# Altium PCB Linux_board.va_2.PcbDoc (part 1 of 2)
Units mil, origin at the board's own origin, x right, y up, seen from the top; angles counter-clockwise.
Board outline 3960 x 3160 mil, 2 copper layers (Top Layer, Bottom Layer); 142 components, 153 nets, 700 pads, 148 vias.
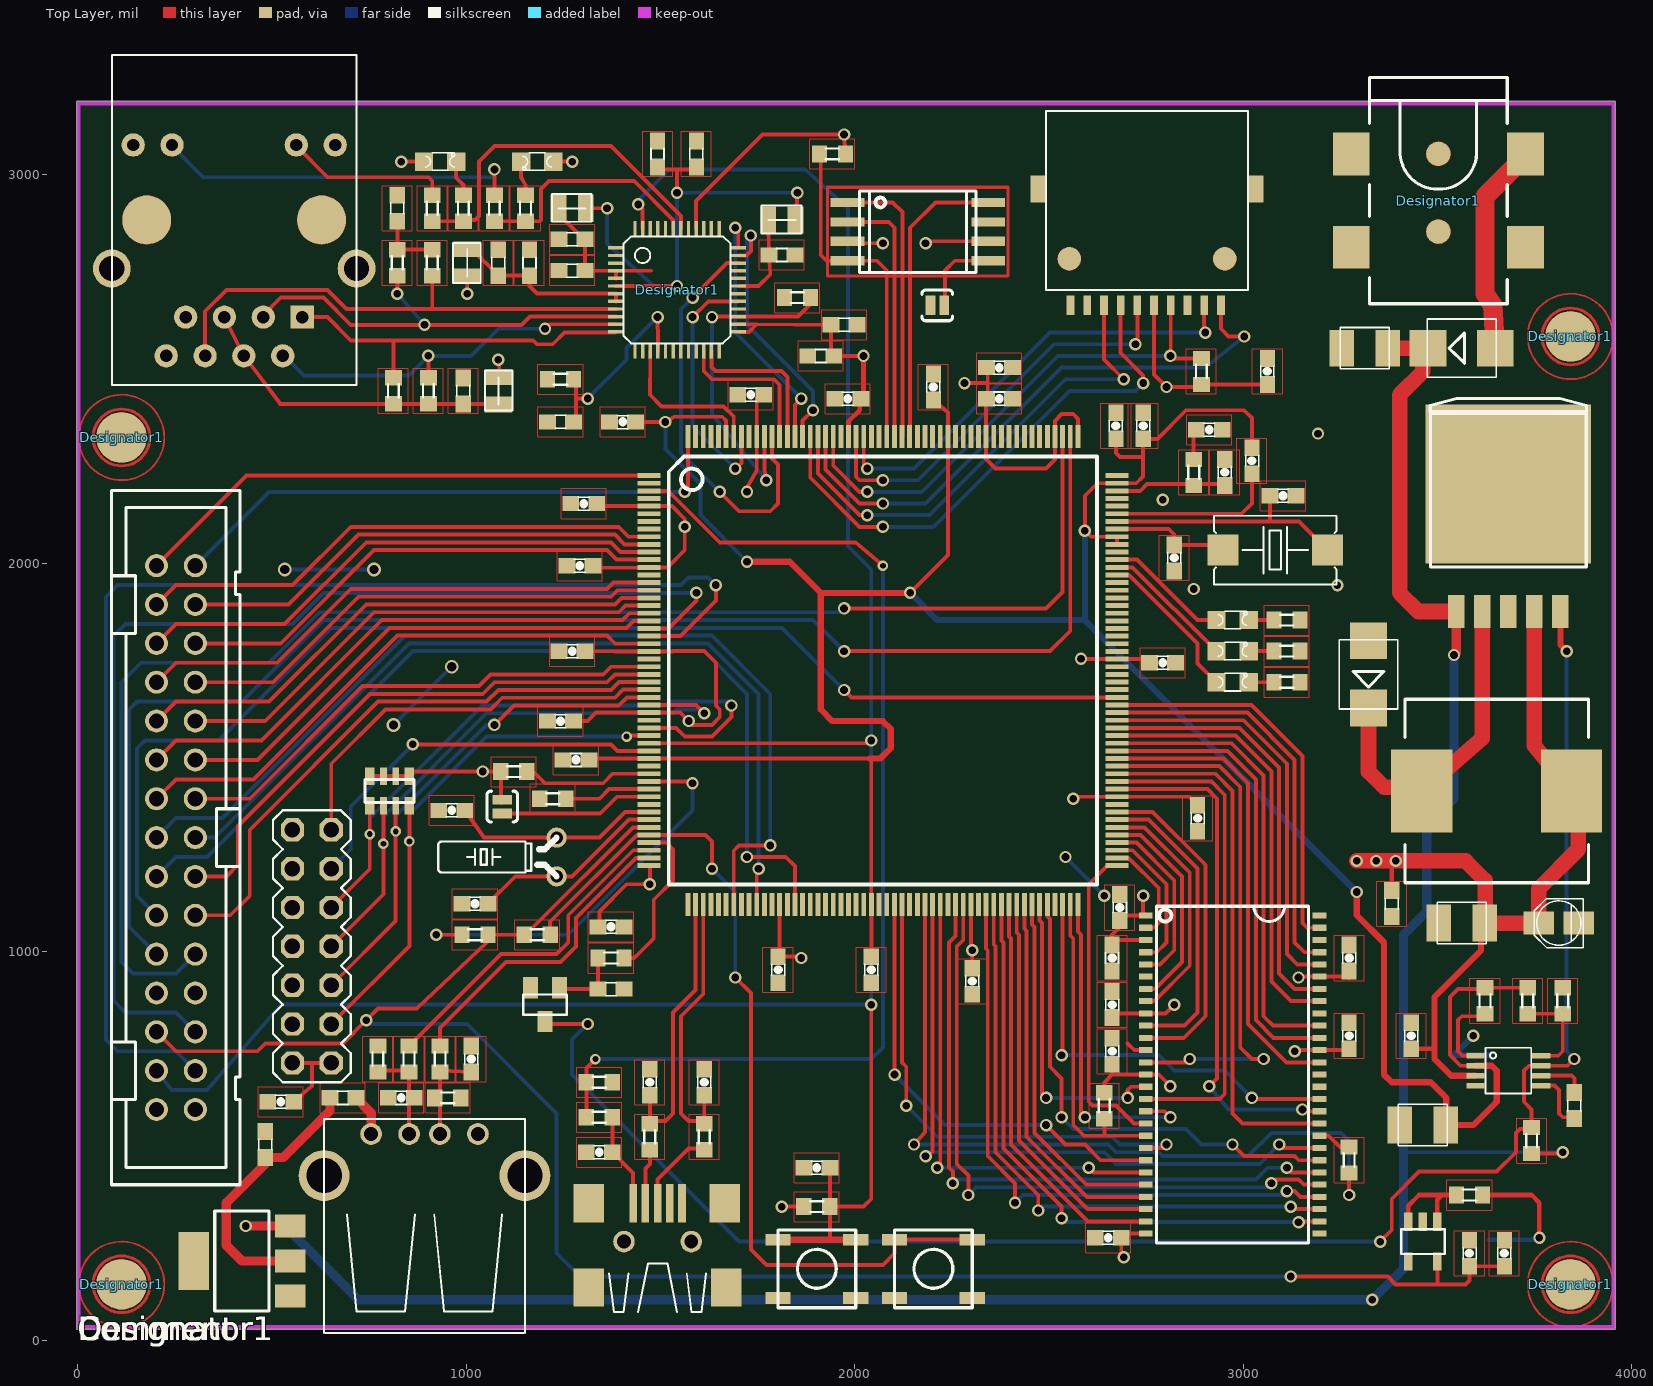
[diagram p0: Top Layer view]
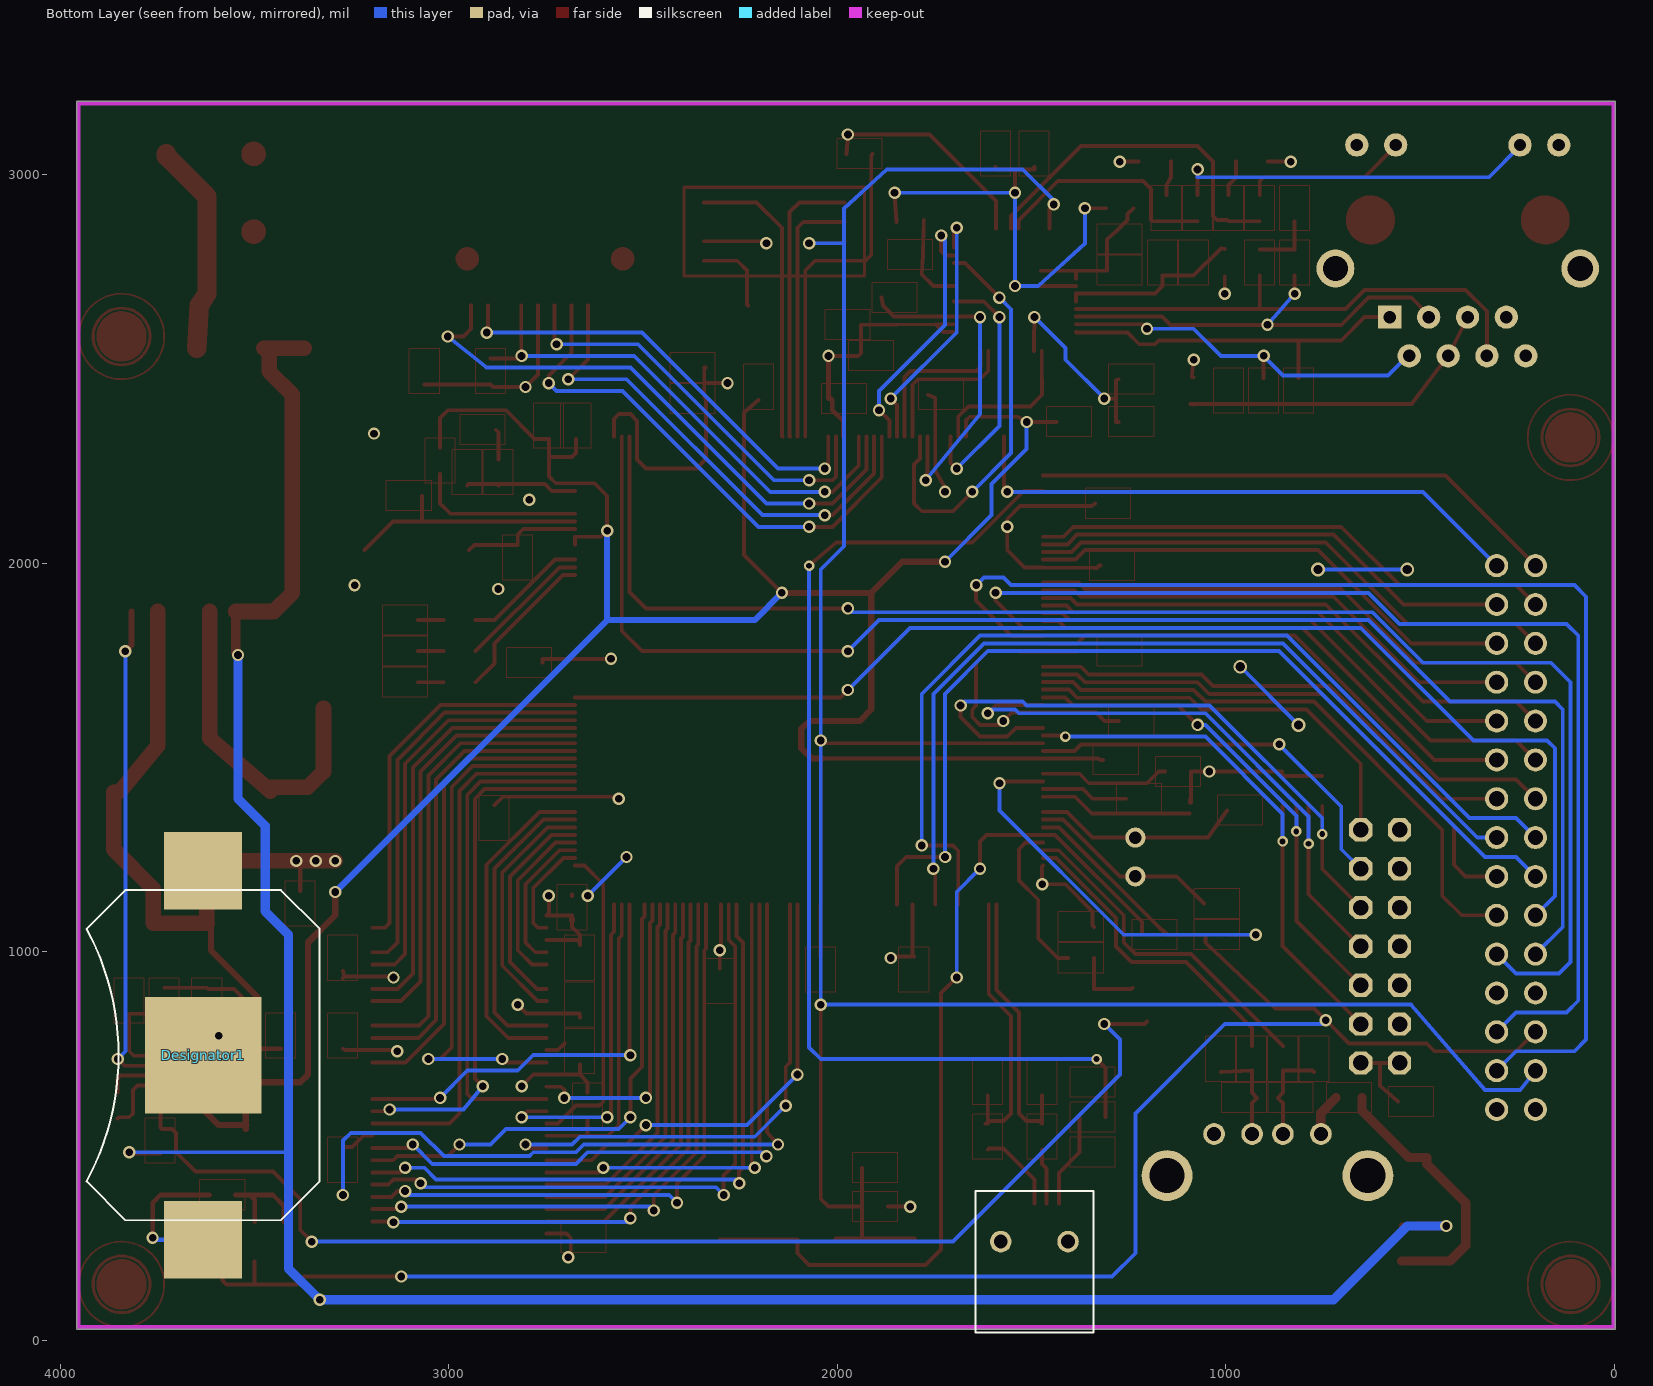
[diagram p1: Bottom Layer view, seen from below]

## Layer stack, top to bottom
Top Layer: signal copper 1.4
Dielectric: dielectric 12.6, FR-4, Dk 4.8
Bottom Layer: signal copper 1.4

## Board outline
-1.98,29.27 3958.02,29.27 3958.02,3189.27 -1.98,3189.27

## Design rules (kind name [scope] priority, off if disabled: settings)
Clearance [All] p1: gap=10
PolygonConnect [All] p1: connectstyle=Relief reliefconductorwidth=10 reliefentries=4 polygonreliefangle="90 Angle"
RoutingVias [All] p1: holewidth=28 width=50 viastyle="Through Hole" minholewidth=28 minwidth=50 maxholewidth=28 maxwidth=50
SilkscreenOverComponentPads [All] p1: minsilkscreentomaskgap=10
SolderMaskExpansion [All] p1: expansion=4
Width [All] p1: maxlimit=10 minlimit=10 preferedwidth=10
27 further rules are at their usual default settings.

## Components (designator, comment, footprint, x,y, rotation, side; value= is the part's Value field where it differs from the comment)
Designator1 "Comment" PAK100/2500-30 253.02,1294.27 r90 top (schematic designator X4)
Designator1 "Comment" 5X8 3083.02,2034.27 r0 top (schematic designator X3)
Designator1 "Comment" USB-A-H 893.02,424.27 r90 top (schematic designator X2)
Designator1 "Comment" USB-MB-S 1493.02,254.27 r90 top (schematic designator X1)
Designator1 "Comment" TACT_SWITCH_SMALL 2203.02,184.27 r180 top (schematic designator WAKE)
Designator1 "Comment" SOT223 423.02,204.27 r90 top (schematic designator VREG1)
Designator1 "Comment" SOT-23-5 3463.02,254.27 r180 top (schematic designator VR1)
Designator1 "Comment" MICROSD 2943.02,2664.27 r270 top (schematic designator USD)
Designator1 "Comment" PQFP208 2073.02,1724.27 r0 top (schematic designator U3)
Designator1 "Comment" SO08W 2163.02,2854.27 r270 top (schematic designator U1)
Designator1 "Comment" CDRH125 3653.02,1414.27 r90 top (schematic designator U$3)
Designator1 "Comment" POWER_JACK_SMD 3503.02,3054.27 r270 top (schematic designator U$2)
Designator1 "Comment" 48PIN-TQFN 1543.02,2704.27 r0 top (schematic designator U$1)
Designator1 "Comment" TACT_SWITCH_SMALL 1903.02,184.27 r0 top (schematic designator SW1)
Designator1 "Comment" MA07-2 603.02,1014.27 r90 top (schematic designator SV1)
Designator1 "Comment" CHIPLED_0805 933.02,3034.27 r270 top (schematic designator SPEED)
Designator1 "Comment" SJ_2S-NO 2213.02,2664.27 r180 top (schematic designator SJ6)
Designator1 "Comment" SJ_2S-NO 1093.02,1374.27 r270 top (schematic designator SJ3)
Designator1 "Comment" RN8P-4R-CRA06S 803.02,1414.27 r0 top (schematic designator RN2)
Designator1 "Comment" R0603 993.02,2914.27 r90 top (schematic designator R36)
Designator1 "Comment" R0603 1153.02,2914.27 r90 top (schematic designator R35)
Designator1 "Comment" R0603 3623.02,874.27 r90 top (schematic designator R34)
Designator1 "Comment" R0603 3733.02,874.27 r270 top (schematic designator R33)
Designator1 "Comment" R0603 3823.02,874.27 r270 top (schematic designator R32)
Designator1 "Comment" R0603 3273.02,464.27 r270 top (schematic designator R31)
Designator1 "Comment" R0603 1373.02,984.27 r180 top (schematic designator R30)
Designator1 "Comment" R0603 3743.02,514.27 r270 top (schematic designator R29)
Designator1 "Comment" R0603 813.02,2444.27 r270 top (schematic designator R28)
Designator1 "Comment" R0603 1903.02,344.27 r0 top (schematic designator R27)
Designator1 "Comment" R0603 903.02,2444.27 r270 top (schematic designator R26)
Designator1 "Comment" R0603 1123.02,1464.27 r0 top (schematic designator R25)
Designator1 "Comment" R0603 823.02,2774.27 r90 top (schematic designator R24)
Designator1 "Comment" R0603 3583.02,374.27 r180 top (schematic designator R23)
Designator1 "Comment" R0603 3113.02,1694.27 r0 top (schematic designator R22)
Designator1 "Comment" R0603 1183.02,1044.27 r180 top (schematic designator R21)
Designator1 "Comment" R0603 2873.02,2234.27 r90 top (schematic designator R20)
Designator1 "Comment" R0603 1023.02,1044.27 r0 top (schematic designator R19)
Designator1 "Comment" R0603 3113.02,1774.27 r0 top (schematic designator R17)
Designator1 "Comment" R0603 3113.02,1854.27 r0 top (schematic designator R16)
Designator1 "Comment" R0603 1243.02,2474.27 r180 top (schematic designator R15)
Designator1 "Comment" R0603 1223.02,1394.27 r0 top (schematic designator R14)
Designator1 "Comment" R0603 2893.02,2494.27 r270 top (schematic designator R13)
Designator1 "Comment" R0603 1343.02,664.27 r0 top (schematic designator R12)
Designator1 "Comment" R0603 1343.02,574.27 r180 top (schematic designator R11)
Designator1 "Comment" R0603 913.02,2774.27 r90 top (schematic designator R10)
Designator1 "Comment" R0603 1853.02,2684.27 r0 top (schematic designator R9)
Designator1 "Comment" R0603 953.02,624.27 r180 top (schematic designator R8)
Designator1 "Comment" R0603 773.02,724.27 r270 top (schematic designator R7)
Designator1 "Comment" R0603 2643.02,604.27 r270 top (schematic designator R6)
Designator1 "Comment" R0603 1073.02,2914.27 r90 top (schematic designator R5A)
Designator1 "Comment" R0603 1943.02,3054.27 r0 top (schematic designator R5)
Designator1 "Comment" R0603 913.02,2914.27 r90 top (schematic designator R4A)
Designator1 "Comment" R0603 933.02,724.27 r90 top (schematic designator R4)
Designator1 "Comment" R0603 853.02,724.27 r90 top (schematic designator R3)
Designator1 "Comment" R0603 1473.02,524.27 r90 top (schematic designator R2)
Designator1 "Comment" R0603 1613.02,524.27 r90 top (schematic designator R1)
Designator1 "Comment" SOT23 1203.02,864.27 r180 top (schematic designator Q2)
Designator1 "Comment" TC26H 1233.02,1244.27 r90 top (schematic designator Q1)
Designator1 "Comment" CHIPLED_0805 1183.02,3034.27 r90 top (schematic designator LINK/ACT)
Designator1 "Comment" CHIPLED_0805 2973.02,1694.27 r270 top (schematic designator LED3)
Designator1 "Comment" CHIPLED_0805 2973.02,1774.27 r270 top (schematic designator LED2)
Designator1 "Comment" CHIPLED_0805 2973.02,1854.27 r270 top (schematic designator LED1)
Designator1 "Comment" WE-KI_0805_B 1813.02,2884.27 r0 top (schematic designator L4)
Designator1 "Comment" WE-KI_0805_B 1273.02,2914.27 r0 top (schematic designator L3)
Designator1 "Comment" WE-KI_0805_B 1003.02,2774.27 r90 top (schematic designator L2)
Designator1 "Comment" WE-KI_0805_B 1083.02,2444.27 r270 top (schematic designator L1)
Designator1 "Comment" STAND-OFF 113.02,144.27 r0 top (schematic designator JP4)
Designator1 "Comment" STAND-OFF 3843.02,144.27 r0 top (schematic designator JP3)
Designator1 "Comment" STAND-OFF 113.02,2324.27 r0 top (schematic designator JP2)
Designator1 "Comment" STAND-OFF 3843.02,2584.27 r0 top (schematic designator JP1)
Designator1 "Comment" HR911105A 403.02,2884.27 r0 top (schematic designator J4)
Designator1 "Comment" MSOP8 3683.02,694.27 r0 top (schematic designator IC4)
Designator1 "Comment" TSOP54-400 2973.02,684.27 r270 top (schematic designator IC2)
Designator1 "Comment" TO263-5 3683.02,2104.27 r0 top (schematic designator IC1)
Designator1 "Comment" 0603 683.02,624.27 r180 top (schematic designator F1)
Designator1 "Comment" SMB 3323.02,1714.27 r90 top (schematic designator D2)
Designator1 "Comment" SMB 3563.02,2554.27 r0 top (schematic designator D1)
Designator1 "Comment" C0603 823.02,2914.27 r90 top (schematic designator C75)
Designator1 "Comment" C0603 3383.02,1124.27 r270 top (schematic designator C74)
Designator1 "Comment" 0603-CAP 523.02,614.27 r180 top (schematic designator C63)
Designator1 "Comment" 0603-CAP 2373.02,2504.27 r180 top (schematic designator C62)
Designator1 "Comment" C0603 1243.02,2364.27 r0 top (schematic designator C61)
Designator1 "Comment" C0603 993.02,2444.27 r90 top (schematic designator C60)
Designator1 "Comment" C0603 1913.02,2534.27 r180 top (schematic designator C59)
Designator1 "Comment" C0603 1973.02,2614.27 r0 top (schematic designator C58)
Designator1 "Comment" C0603 1813.02,2794.27 r180 top (schematic designator C57)
Designator1 "Comment" C0603 1273.02,2754.27 r180 top (schematic designator C56)
Designator1 "Comment" C0603 1273.02,2834.27 r180 top (schematic designator C55)
Designator1 "Comment" 0603-CAP 1803.02,954.27 r270 top (schematic designator C53)
Designator1 "Comment" C0603 1593.02,3054.27 r90 top (schematic designator C52)
Designator1 "Comment" 0603-CAP 3273.02,984.27 r270 top (schematic designator C51)
Designator1 "Comment" 0603-CAP 3273.02,784.27 r270 top (schematic designator C50)
Designator1 "Comment" 0603-CAP 2663.02,864.27 r270 top (schematic designator C49)
Designator1 "Comment" 0603-CAP 2663.02,984.27 r90 top (schematic designator C48)
Designator1 "Comment" 0603-CAP 2653.02,264.27 r0 top (schematic designator C47)
Designator1 "Comment" 0603-CAP 2663.02,744.27 r270 top (schematic designator C46)
Designator1 "Comment" 0603-CAP 2683.02,1114.27 r270 top (schematic designator C45)
Designator1 "Comment" 0603-CAP 2303.02,924.27 r270 top (schematic designator C44)
Designator1 "Comment" C603 3853.02,604.27 r90 top (schematic designator C43)
Designator1 "Comment" SMC_B 3463.02,554.27 r180 top (schematic designator C42)
Designator1 "Comment" C603 483.02,504.27 r270 top (schematic designator C41)
Designator1 "Comment" 0603-CAP 2883.02,1344.27 r270 top (schematic designator C40)
Designator1 "Comment" SMC_B 3563.02,1074.27 r180 top (schematic designator C39)
Designator1 "Comment" CASE_A 3813.02,1074.27 r180 top (schematic designator C38)
Designator1 "Comment" 0603-CAP 2793.02,1744.27 r0 top (schematic designator C37)
Designator1 "Comment" C0603 1493.02,3054.27 r90 top (schematic designator C36)
Designator1 "Comment" 0603-CAP 3583.02,224.27 r270 top (schematic designator C35)
Designator1 "Comment" 0603-CAP 1903.02,444.27 r180 top (schematic designator C34)
Designator1 "Comment" SMC_B 3313.02,2554.27 r180 top (schematic designator C33)
Designator1 "Comment" C603 1373.02,904.27 r180 top (schematic designator C32)
Designator1 "Comment" 0603-CAP 2913.02,2344.27 r180 top (schematic designator C31)
Designator1 "Comment" 0603-CAP 2953.02,2234.27 r270 top (schematic designator C30)
Designator1 "Comment" 0603-CAP 3023.02,2264.27 r270 top (schematic designator C29)
Designator1 "Comment" 0603-CAP 2743.02,2354.27 r90 top (schematic designator C28)
Designator1 "Comment" 0603-CAP 3673.02,224.27 r90 top (schematic designator C27)
Designator1 "Comment" C0603 1163.02,2774.27 r270 top (schematic designator C26)
Designator1 "Comment" 0603-CAP 3433.02,784.27 r90 top (schematic designator C25)
Designator1 "Comment" 0603-CAP 3063.02,2494.27 r90 top (schematic designator C24)
Designator1 "Comment" 0603-CAP 1733.02,2434.27 r180 top (schematic designator C23)
Designator1 "Comment" 0603-CAP 1983.02,2424.27 r180 top (schematic designator C22)
Designator1 "Comment" 0603-CAP 1373.02,1064.27 r0 top (schematic designator C21)
Designator1 "Comment" 0603-CAP 1243.02,1594.27 r180 top (schematic designator C20)
Designator1 "Comment" 0603-CAP 1273.02,1774.27 r180 top (schematic designator C19)
Designator1 "Comment" 0603-CAP 1293.02,1994.27 r180 top (schematic designator C18)
Designator1 "Comment" 0603-CAP 1303.02,2154.27 r180 top (schematic designator C17)
Designator1 "Comment" 0603-CAP 2203.02,2454.27 r90 top (schematic designator C16)
Designator1 "Comment" 0603-CAP 2673.02,2354.27 r90 top (schematic designator C15)
Designator1 "Comment" 0603-CAP 2043.02,954.27 r270 top (schematic designator C14)
Designator1 "Comment" 0603-CAP 1283.02,1494.27 r180 top (schematic designator C13)
Designator1 "Comment" C0603 1083.02,2774.27 r270 top (schematic designator C12)
Designator1 "Comment" 0603-CAP 1023.02,1124.27 r0 top (schematic designator C11)
Designator1 "Comment" 0603-CAP 963.02,1364.27 r0 top (schematic designator C10)
Designator1 "Comment" 0603-CAP 2823.02,2014.27 r90 top (schematic designator C9)
Designator1 "Comment" 0603-CAP 3103.02,2174.27 r180 top (schematic designator C8)
Designator1 "Comment" 0603-CAP 1403.02,2364.27 r180 top (schematic designator C7)
Designator1 "Comment" 0603-CAP 2373.02,2424.27 r0 top (schematic designator C6)
Designator1 "Comment" 0603-CAP 1013.02,724.27 r90 top (schematic designator C5)
Designator1 "Comment" 0603-CAP 833.02,624.27 r180 top (schematic designator C4)
Designator1 "Comment" 0603-CAP 1343.02,484.27 r0 top (schematic designator C3)
Designator1 "Comment" 0603-CAP 1613.02,664.27 r270 top (schematic designator C2)
Designator1 "Comment" 0603-CAP 1473.02,664.27 r270 top (schematic designator C1)
Designator1 "Comment" 2032 3633.02,734.27 r270 bottom (schematic designator BATT1)

## Footprints (in the part's own frame and the unit in brackets; to place one, negate y for a bottom-side part, rotate by r counter-clockwise, add the part's x,y. Pads: shape width x height; smd on the part's side, far side on the other; paste and mask are expansions set on the pad)
5X8 [mil]
  rect 80x80 smd: 1(-135,0) 2(135,0)
  silkscreen extent -157,-89 157,89
48PIN-TQFN [mm]
  rect 1x0.22 smd: P$1(-4,2.75) P$2(-4,2.25) P$3(-4,1.75) P$4(-4,1.25) P$5(-4,0.75) P$6(-4,0.25) P$7(-4,-0.25) P$8(-4,-0.75) P$9(-4,-1.25) P$10(-4,-1.75) P$11(-4,-2.25) P$12(-4,-2.75) P$25(4,-2.75) P$26(4,-2.25) P$27(4,-1.75) P$28(4,-1.25) P$29(4,-0.75) P$30(4,-0.25) P$31(4,0.25) P$32(4,0.75) P$33(4,1.25) P$34(4,1.75) P$35(4,2.25) P$36(4,2.75)
  rect 0.22x1 smd: P$13(-2.75,-4) P$14(-2.25,-4) P$15(-1.75,-4) P$16(-1.25,-4) P$17(-0.75,-4) P$18(-0.25,-4) P$19(0.25,-4) P$20(0.75,-4) P$21(1.25,-4) P$22(1.75,-4) P$23(2.25,-4) P$24(2.75,-4) P$37(2.75,4) P$38(2.25,4) P$39(1.75,4) P$40(1.25,4) P$41(0.75,4) P$42(0.25,4) P$43(-0.25,4) P$44(-0.75,4) P$45(-1.25,4) P$46(-1.75,4) P$47(-2.25,4) P$48(-2.75,4)
  silkscreen extent -3.5,-3.5 3.5,3.5
0603 [mm]
  rect 1.1x1 smd: 1(-0.85,0) 2(0.85,0)
  Top Layer lines w0.051: 1.473,0.983 1.473,-0.983 -1.473,-0.983 -1.473,0.983 1.473,0.983
  silkscreen extent -0.36,-0.42 0.36,0.43
0603-CAP [mm]
  rect 1.1x1 smd: 1(-0.85,0) 2(0.85,0)
  Top Layer lines w0.051: 1.473,0.983 1.473,-0.983 -1.473,-0.983 -1.473,0.983 1.473,0.983
  silkscreen extent -0.36,-0.42 0.36,0.43
2032 [mil]
  rect 200x200 smd: V1(-475,0) V2(475,0)
  rect 300x300 smd: V-(0,0)
  silkscreen extent -425,-300 425,300
C0603 [mm]
  rect 1.1x1 smd: 1(-0.85,0) 2(0.85,0)
  Top Layer lines w0.051: -1.473,0.983 -1.473,-0.983 1.473,-0.983 1.473,0.983 -1.473,0.983
  silkscreen extent -0.36,-0.42 0.36,0.43
C603 [mm]
  rect 1.1x1 smd: 1(-0.85,0) 2(0.85,0)
  silkscreen extent -0.36,-0.42 0.36,0.43
CASE_A [mm]
  rect 2x1.5 smd: +(1.3,0) -(-1.3,0)
  silkscreen extent -1.6,-1.6 1.6,1.6
CDRH125 [mm]
  rect 5.4x4 smd: 1(0,4.9) 2(0,-4.9)
  silkscreen extent -6,-6 6,6
CHIPLED_0805 [mm]
  rect 1.2x1.2 smd: A(0,-1.05) C(0,1.05)
  silkscreen extent -0.58,-0.93 0.58,0.95
HR911105A [mil]
  rect 60x60 hole 32: 1(175,-250)
  round 60 hole 32: 2(125,-350) 3(75,-250) 4(25,-350) 5(-25,-250) 6(-75,-350) 7(-125,-250) 8(-175,-350) 9(260,193) 10(160,193) 11(-160,193) 12(-260,193)
  round 97.5 hole 65: 13(315,-125) 14(-315,-125)
  round 126 smd: ""(-225,0) ""(225,0)
  silkscreen extent -315,-425 315,425
MA07-2 [mil]
  oct 60x60 hole 40: 1(-300,-50) 2(-300,50) 3(-200,-50) 4(-200,50) 5(-100,-50) 6(-100,50) 7(0,-50) 8(0,50) 9(100,-50) 10(100,50) 11(200,-50) 12(200,50) 13(300,-50) 14(300,50)
  silkscreen extent -350,-100 350,100
MICROSD [mil]
  rect 50x20 smd: 1(0,-301) 2(0,-258) 3(0,-215) 4(0,-172) 5(0,-129) 6(0,-86) 7(0,-43) 8(0,0) 9(0,-344) 10(0,-387)
  rect 70x40 smd: RSV1(-300,90) RSV2(-300,-470)
  round 60 smd: ""(-120,10) ""(-120,-390)
  silkscreen extent -500,-450 -40,70
MSOP8 [mm]
  rect 1.2x0.35 smd: 1(-2.145,0.975) 2(-2.145,0.325) 3(-2.145,-0.325) 4(-2.145,-0.975) 5(2.145,-0.975) 6(2.145,-0.325) 7(2.145,0.325) 8(2.145,0.975)
  silkscreen extent -1.5,-1.5 1.5,1.5
PAK100/2500-30 [mm]
  round 1.508 hole 1: 1(-17.78,-1.27) 2(-17.78,1.27) 3(-15.24,-1.27) 4(-15.24,1.27) 5(-12.7,-1.27) 6(-12.7,1.27) 7(-10.16,-1.27) 8(-10.16,1.27) 9(-7.62,-1.27) 10(-7.62,1.27) 11(-5.08,-1.27) 12(-5.08,1.27) 13(-2.54,-1.27) 14(-2.54,1.27) 15(0,-1.27) 16(0,1.27) 17(2.54,-1.27) 18(2.54,1.27) 19(5.08,-1.27) 20(5.08,1.27) 21(7.62,-1.27) 22(7.62,1.27) 23(10.16,-1.27) 24(10.16,1.27) 25(12.7,-1.27) 26(12.7,1.27) 27(15.24,-1.27) 28(15.24,1.27) 29(17.78,-1.27) 30(17.78,1.27)
  silkscreen extent -22.7,-4.2 22.7,4.2
POWER_JACK_SMD [mm]
  rect 2.8x2.4 smd: GND(0,-5.7) P$4(6.1,-5.7) VIN0(0,5.7) VIN1(6.1,5.7)
  round 1.6 smd: ""(0,0) ""(5.08,0)
  silkscreen extent -5,-4.5 9.8,4.5
PQFP208 [mm]
  rect 1.5x0.32 smd: 1(-15.3,12.75) 2(-15.3,12.25) 3(-15.3,11.75) 4(-15.3,11.25) 5(-15.3,10.75) 6(-15.3,10.25) 7(-15.3,9.75) 8(-15.3,9.25) 9(-15.3,8.75) 10(-15.3,8.25) 11(-15.3,7.75) 12(-15.3,7.25) 13(-15.3,6.75) 14(-15.3,6.25) 15(-15.3,5.75) 16(-15.3,5.25) 17(-15.3,4.75) 18(-15.3,4.25) 19(-15.3,3.75) 20(-15.3,3.25) 21(-15.3,2.75) 22(-15.3,2.25) 23(-15.3,1.75) 24(-15.3,1.25) 25(-15.3,0.75) 26(-15.3,0.25) 27(-15.3,-0.25) 28(-15.3,-0.75) 29(-15.3,-1.25) 30(-15.3,-1.75) 31(-15.3,-2.25) 32(-15.3,-2.75) 33(-15.3,-3.25) 34(-15.3,-3.75) 35(-15.3,-4.25) 36(-15.3,-4.75) 37(-15.3,-5.25) 38(-15.3,-5.75) 39(-15.3,-6.25) 40(-15.3,-6.75) 41(-15.3,-7.25) 42(-15.3,-7.75) 43(-15.3,-8.25) 44(-15.3,-8.75) 45(-15.3,-9.25) 46(-15.3,-9.75) 47(-15.3,-10.25) 48(-15.3,-10.75) 49(-15.3,-11.25) 50(-15.3,-11.75) 51(-15.3,-12.25) 52(-15.3,-12.75) 105(15.3,-12.75) 106(15.3,-12.25) 107(15.3,-11.75) 108(15.3,-11.25) 109(15.3,-10.75) 110(15.3,-10.25) 111(15.3,-9.75) 112(15.3,-9.25) 113(15.3,-8.75) 114(15.3,-8.25) 115(15.3,-7.75) 116(15.3,-7.25) 117(15.3,-6.75) 118(15.3,-6.25) 119(15.3,-5.75) 120(15.3,-5.25) 121(15.3,-4.75) 122(15.3,-4.25) 123(15.3,-3.75) 124(15.3,-3.25) 125(15.3,-2.75) 126(15.3,-2.25) 127(15.3,-1.75) 128(15.3,-1.25) 129(15.3,-0.75) 130(15.3,-0.25) 131(15.3,0.25) 132(15.3,0.75) 133(15.3,1.25) 134(15.3,1.75) 135(15.3,2.25) 136(15.3,2.75) 137(15.3,3.25) 138(15.3,3.75) 139(15.3,4.25) 140(15.3,4.75) 141(15.3,5.25) 142(15.3,5.75) 143(15.3,6.25) 144(15.3,6.75) 145(15.3,7.25) 146(15.3,7.75) 147(15.3,8.25) 148(15.3,8.75) 149(15.3,9.25) 150(15.3,9.75) 151(15.3,10.25) 152(15.3,10.75) 153(15.3,11.25) 154(15.3,11.75) 155(15.3,12.25) 156(15.3,12.75)
  rect 0.32x1.5 smd: 53(-12.75,-15.3) 54(-12.25,-15.3) 55(-11.75,-15.3) 56(-11.25,-15.3) 57(-10.75,-15.3) 58(-10.25,-15.3) 59(-9.75,-15.3) 60(-9.25,-15.3) 61(-8.75,-15.3) 62(-8.25,-15.3) 63(-7.75,-15.3) 64(-7.25,-15.3) 65(-6.75,-15.3) 66(-6.25,-15.3) 67(-5.75,-15.3) 68(-5.25,-15.3) 69(-4.75,-15.3) 70(-4.25,-15.3) 71(-3.75,-15.3) 72(-3.25,-15.3) 73(-2.75,-15.3) 74(-2.25,-15.3) 75(-1.75,-15.3) 76(-1.25,-15.3) 77(-0.75,-15.3) 78(-0.25,-15.3) 79(0.25,-15.3) 80(0.75,-15.3) 81(1.25,-15.3) 82(1.75,-15.3) 83(2.25,-15.3) 84(2.75,-15.3) 85(3.25,-15.3) 86(3.75,-15.3) 87(4.25,-15.3) 88(4.75,-15.3) 89(5.25,-15.3) 90(5.75,-15.3) 91(6.25,-15.3) 92(6.75,-15.3) 93(7.25,-15.3) 94(7.75,-15.3) 95(8.25,-15.3) 96(8.75,-15.3) 97(9.25,-15.3) 98(9.75,-15.3) 99(10.25,-15.3) 100(10.75,-15.3) 101(11.25,-15.3) 102(11.75,-15.3) 103(12.25,-15.3) 104(12.75,-15.3) 157(12.75,15.3) 158(12.25,15.3) 159(11.75,15.3) 160(11.25,15.3) 161(10.75,15.3) 162(10.25,15.3) 163(9.75,15.3) 164(9.25,15.3) 165(8.75,15.3) 166(8.25,15.3) 167(7.75,15.3) 168(7.25,15.3) 169(6.75,15.3) 170(6.25,15.3) 171(5.75,15.3) 172(5.25,15.3) 173(4.75,15.3) 174(4.25,15.3) 175(3.75,15.3) 176(3.25,15.3) 177(2.75,15.3) 178(2.25,15.3) 179(1.75,15.3) 180(1.25,15.3) 181(0.75,15.3) 182(0.25,15.3) 183(-0.25,15.3) 184(-0.75,15.3) 185(-1.25,15.3) 186(-1.75,15.3) 187(-2.25,15.3) 188(-2.75,15.3) 189(-3.25,15.3) 190(-3.75,15.3) 191(-4.25,15.3) 192(-4.75,15.3) 193(-5.25,15.3) 194(-5.75,15.3) 195(-6.25,15.3) 196(-6.75,15.3) 197(-7.25,15.3) 198(-7.75,15.3) 199(-8.25,15.3) 200(-8.75,15.3) 201(-9.25,15.3) 202(-9.75,15.3) 203(-10.25,15.3) 204(-10.75,15.3) 205(-11.25,15.3) 206(-11.75,15.3) 207(-12.25,15.3) 208(-12.75,15.3)
  silkscreen extent -14,-14 14,14
R0603 [mm]
  rect 1x1.1 smd: 1(-0.85,0) 2(0.85,0)
  Top Layer lines w0.051: -1.473,0.983 -1.473,-0.983 1.473,-0.983 1.473,0.983 -1.473,0.983
  silkscreen extent -0.43,-0.36 0.43,0.36
RN8P-4R-CRA06S [mm]
  rect 0.63x1.15 smd: 1(-1.295,-0.975) 4(1.295,-0.975) 5(1.295,0.975) 8(-1.295,0.975)
  rect 0.44x1.15 smd: 2(-0.4,-0.975) 3(0.4,-0.975) 6(0.4,0.975) 7(-0.4,0.975)
  silkscreen extent -1.6,-0.75 1.6,0.75
SJ_2S-NO [mil]
  rect 25x50 smd: 1(-17.72,0) 2(17.71,0)
  silkscreen extent -40,-39 40,39
SMB [mm]
  rect 2.4x2.4 smd: A(2.2,0) C(-2.2,0)
  silkscreen extent -2.26,-1.91 2.26,1.91
SMC_B [mm]
  rect 1.6x2.4 smd: +(-1.5,0) -(1.5,0)
  silkscreen extent -1.6,-1.35 1.6,1.35
SO08W [mm]
  rect 0.6x2.2 smd: 1(-1.905,-4.6) 2(-0.635,-4.6) 3(0.635,-4.6) 4(1.905,-4.6) 5(1.905,4.6) 6(0.635,4.6) 7(-0.635,4.6) 8(-1.905,4.6)
  Top Layer lines w0.2: 2.9,-5.9 -2.9,-5.9 -2.9,5.9 2.9,5.9 2.9,-5.9
  silkscreen extent -2.67,-3.81 2.67,3.81
SOT23 [mm]
  rect 1x1.4 smd: 1(-0.95,-1.1) 2(0.95,-1.1) 3(0,1.1)
  silkscreen extent -1.42,-0.66 1.42,0.66
SOT223 [mm]
  rect 1.5x2 smd: 1(-2.3,-3.15) 2(0,-3.15) 3(2.3,-3.15)
  rect 3.8x2 smd: 4(0,3.15)
  silkscreen extent -3.28,-1.78 3.28,1.78
SOT-23-5 [mm]
  rect 0.55x1.2 smd: 1(-0.95,-1.3) 2(0,-1.3) 3(0.95,-1.3) 4(0.95,1.3) 5(-0.95,1.3)
  silkscreen extent -1.42,-0.81 1.42,0.81
STAND-OFF [mil]
  round 130 smd: ""(0,0)
  Top Layer circle w5: c0,0 r110
  Top Layer lines w8: 0,-73 cw(c0,0) 0,73 ; 0,-73 ccw(c0,0) 0,73 ; 0,-73 cw(c0,0) 0,73 ; 0,-73 ccw(c0,0) 0,73
TACT_SWITCH_SMALL [mil]
  rect 65x30 smd: 1(-100,75) 2(100,75) 3(-100,-75) 4(100,-75)
  silkscreen extent -100,-100 100,100
TC26H [mil]
  round 52 hole 32: 1(-50,0) 2(50,0)
  silkscreen extent -50,0 50,305
TO263-5 [mil]
  rect 42x85 smd: 1(-134,-228) 2(-67,-228) 3(0,-228) 4(67,-228) 5(134,-228)
  rect 425.2x409.84 smd: 6(0,100)
  silkscreen extent -201,-113 201,320
TSOP54-400 [mm]
  rect 0.4x0.9 smd: 1(-10.4,-5.68) 2(-9.6,-5.68) 3(-8.8,-5.68) 4(-8,-5.68) 5(-7.2,-5.68) 6(-6.4,-5.68) 7(-5.6,-5.68) 8(-4.8,-5.68) 9(-4,-5.68) 10(-3.2,-5.68) 11(-2.4,-5.68) 12(-1.6,-5.68) 13(-0.8,-5.68) 14(0,-5.68) 15(0.8,-5.68) 16(1.6,-5.68) 17(2.4,-5.68) 18(3.2,-5.68) 19(4,-5.68) 20(4.8,-5.68) 21(5.6,-5.68) 22(6.4,-5.68) 23(7.2,-5.68) 24(8,-5.68) 25(8.8,-5.68) 26(9.6,-5.68) 27(10.4,-5.68) 28(10.4,5.68) 29(9.6,5.68) 30(8.8,5.68) 31(8,5.68) 32(7.2,5.68) 33(6.4,5.68) 34(5.6,5.68) 35(4.8,5.68) 36(4,5.68) 37(3.2,5.68) 38(2.4,5.68) 39(1.6,5.68) 40(0.8,5.68) 41(0,5.68) 42(-0.8,5.68) 43(-1.6,5.68) 44(-2.4,5.68) 45(-3.2,5.68) 46(-4,5.68) 47(-4.8,5.68) 48(-5.6,5.68) 49(-6.4,5.68) 50(-7.2,5.68) 51(-8,5.68) 52(-8.8,5.68) 53(-9.6,5.68) 54(-10.4,5.68)
  silkscreen extent -11.01,-4.98 11.01,4.98
USB-A-H [mil]
  round 56 hole 36: D+(107,-39.5) D-(107,39.5) GND(107,-137.5) VBUS(107,137.5)
  round 131 hole 91: P$5(0,-258.5) P$6(0,258.5)
  silkscreen extent -405,-258 146,258
USB-MB-S [mm]
  rect 2.5x0.5 smd: D+(2.5,0) D-(2.5,0.8) GND(2.5,-1.6) ID(2.5,-0.8) VBUS(2.5,1.6)
  rect 2.5x2 smd: P$1(-3,-4.5) P$2(-3,4.5) P$3(2.5,-4.4) P$4(2.5,4.5)
  round 1.408 hole 0.9: P$5(0,2.2) P$6(0,-2.2)
  silkscreen extent -4.62,-3.17 -1.44,3.17
WE-KI_0805_B [mm]
  rect 1.02x1.78 smd: 1(-0.89,0) 2(0.89,0)
  silkscreen extent -1.33,-0.88 1.27,0.93

## Via types
v1: diameter 32, hole 20, Top Layer to Bottom Layer, 84 vias
v2: diameter 31.68, hole 19.68, Top Layer to Bottom Layer, 53 vias
v3: diameter 27, hole 15, Top Layer to Bottom Layer, 7 vias
v4: diameter 35.62, hole 23.62, Top Layer to Bottom Layer, 4 vias

## Nets (pads, with @x,y where several pads share a name; then routed paths per layer and width w, separated by ;. In a path a pad name is that pad's centre, name@x,y a point inside that pad or via, vN(x,y) a via of type N, cw(c..) or ccw(c..) an arc to the next point about the centre after c; other vN are vias at no path point)
1.8V: Designator1.1@1316.49,1494.27 Designator1.1@1436.49,2364.27 Designator1.1@2043.02,987.73 Designator1.1@2203.02,2420.8 Designator1.1@2673.02,2320.8 Designator1.1@2743.02,2320.8 Designator1.1@3023.02,2297.73 Designator1.1@3733.02,907.73 Designator1.2@3598.57,707.06 Designator1.2@3623.02,907.73 Designator1.38@1470.66,1497.89 Designator1.77 Designator1.147 Designator1.148 Designator1.155 Designator1.174 Designator1.203 Designator1.+@3522.08,554.27 | length 7753.8
  Top Layer w10: Designator1.1@1316.49,1494.27 1323.02,1494.27 1329.4,1497.89 Designator1.38@1470.66,1497.89 2039.4,1497.89 2043.02,1494.27 2043.02,1122.38 Designator1.77@2043.5,1121.91 2043.5,987.73 Designator1.1@2043.02,987.73 ; Designator1.1@1436.49,2364.27 v2(1513.02,2364.27) 1536.49,2377.73 1659.56,2377.73 1669.48,2367.81 Designator1.203@1669.48,2326.63 ; v2(2143.02,1924.27) 2240.35,2021.59 Designator1.174@2240.35,2326.63 2240.35,2388.13 Designator1.1@2203.02,2420.8 ; Designator1.1@2673.02,2320.8 2673.02,2284.27 2683.02,2274.27 2743.02,2274.27 ; Designator1.147@2675.39,2049.07 Designator1.148@2675.39,2068.76 2608.54,2068.76 v2(2593.02,2084.27) 2593.02,2174.27 2625.31,2206.55 Designator1.155@2675.39,2206.55 2725.31,2206.55 2743.02,2224.27 2743.02,2274.27 ; Designator1.1@3023.02,2297.73 3023.02,2374.27 3003.02,2394.27 2853.02,2394.27 2779.56,2320.8 Designator1.1@2743.02,2320.8 2743.02,2274.27 ; Designator1.2@3598.57,707.06 3560.23,707.06 3533.02,734.27 3533.02,884.27 3553.02,904.27 3619.56,904.27 Designator1.2@3623.02,907.73 Designator1.1@3733.02,907.73
  Top Layer w16: v2(1723.02,2004.27) 1833.02,2004.27 1913.02,1924.27 ; 2039.4,1497.89 2066.65,1497.89 2093.02,1524.27 2093.02,1574.27 2073.02,1594.27 1943.02,1594.27 1913.02,1624.27 1913.02,1924.27 ; v2(2143.02,1924.27) 1913.02,1924.27 ; v2(3293.02,1154.27) 3293.02,1094.27 3363.02,1024.27 3363.02,684.27 3383.02,664.27 3483.02,664.27 3523.02,624.27 Designator1.+@3523.02,554.27 ; Designator1.+@3522.08,554.27 Designator1.+@3523.02,554.27 ; Designator1.+@3523.02,544.27 Designator1.+@3523.02,554.27 ; Designator1.2@3598.57,707.06 3640.23,707.06 3653.02,694.27 3653.02,614.27 3593.02,554.27 Designator1.+@3523.02,554.27
  Bottom Layer w10: v2(1513.02,2364.27) 1513.02,2294.27 1603.02,2204.27 1603.02,2124.27 v2(1723.02,2004.27)
  Bottom Layer w16: v2(2143.02,1924.27) 2213.02,1854.27 2593.02,1854.27 ; v2(2593.02,2084.27) 2593.02,1854.27 ; v2(3293.02,1154.27) 2593.02,1854.27
3.3V: Designator1.1@303.02,594.27 Designator1.1@556.49,614.27 Designator1.1@653.02,714.27 Designator1.1@1003.02,2739.23 Designator1.1@1083.02,2479.31 Designator1.1@1089.56,1464.27 Designator1.1@1093.02,1391.98 Designator1.1@1276.49,1594.27 Designator1.1@1306.49,1774.27 Designator1.1@1326.49,1994.27 Designator1.1@1336.49,2154.27 Designator1.1@1339.56,1064.27 Designator1.1@1766.49,2434.27 Designator1.1@1803.02,987.73 Designator1.1@1869.56,344.27 Designator1.1@1939.56,2614.27 Designator1.1@1946.49,2534.27 Designator1.1@2016.49,2424.27 Designator1.1@2303.02,957.73 Designator1.1@2339.56,2424.27 Designator1.1@2643.02,637.73 Designator1.1@2749.4,1093.72 Designator1.1@2759.56,1744.27 Designator1.1@2883.02,1377.73 Designator1.1@3063.02,2460.8 Designator1.1@3383.02,1157.73 Designator1.1@3433.02,750.8 Designator1.2@203.02,594.27 Designator1.2@553.02,714.27 Designator1.2@1976.49,3054.27 Designator1.2@2339.56,2504.27 Designator1.2@2663.02,710.8 Designator1.2@2663.02,830.8 Designator1.2@2663.02,1017.73 Designator1.2@2683.02,1080.8 Designator1.2@2686.49,264.27 Designator1.2@2893.02,2460.8 Designator1.2@3273.02,750.8 Designator1.2@3273.02,950.8 Designator1.2@3845.94,1414.27 Designator1.3@2749.4,1030.72 Designator1.3@3598.57,681.47 Designator1.4@2771.02,2664.27 Designator1.4@3750.02,1876.27 Designator1.5@854.01,1452.65 Designator1.5@1470.66,2147.5 Designator1.6@818.77,1452.65 Designator1.6@2344.13,2829.27 Designator1.7@787.28,1452.65 Designator1.8@752.04,1452.65 Designator1.9@663.02,3077.27 Designator1.9@2749.4,841.75 Designator1.12@143.02,3077.27 Designator1.13@1470.66,1990.02 Designator1.14@2749.4,684.27 Designator1.24@1470.66,1773.48 Designator1.27@2749.4,274.82 Designator1.32@1470.66,1616 Designator1.43@3196.65,747.26 Designator1.49@3196.65,936.24 Designator1.52@1470.66,1222.3 Designator1.65 Designator1.90 Designator1.114 Designator1.132 Designator1.157 Designator1.160 Designator1.169 Designator1.187 Designator1.199 Designator1.+@3622.08,1074.27 Designator1.+@3761.84,1074.27 Designator1.A@891.68,3034.27 Designator1.A@1224.36,3034.27 Designator1.P$25 Designator1.P$26 Designator1.P$40 | length 9713.5
  Top Layer w10: Designator1.2@553.02,714.27 603.02,714.27 ; Designator1.1@556.49,614.27 603.02,654.27 603.02,714.27 ; Designator1.1@653.02,714.27 603.02,714.27 ; Designator1.8@752.04,1452.65 Designator1.7@787.28,1452.65 Designator1.6@818.77,1452.65 Designator1.5@854.01,1452.65 855.62,1464.27 v2(1043.02,1464.27) Designator1.1@1089.56,1464.27 1089.56,1384.27 1093.02,1384.27 Designator1.1@1093.02,1391.98 ; v2(833.02,3034.27) Designator1.A@891.68,3034.27 ; v2(1003.02,2694.27) Designator1.1@1003.02,2739.23 ; Designator1.1@1083.02,2479.31 1088.06,2479.31 v2(1083.02,2524.27) ; Designator1.A@1224.36,3034.27 v2(1273.02,3034.27) ; Designator1.1@1276.49,1594.27 1313.02,1594.27 1334.76,1616 Designator1.32@1470.66,1616 1551.29,1616 v2(1573.02,1594.27) 1583.02,1584.27 1633.02,1584.27 1653.02,1604.27 1653.02,1624.27 1643.02,1634.27 1643.02,1744.27 1613.02,1774.27 1533.02,1774.27 1532.24,1773.48 Designator1.24@1470.66,1773.48 1382.24,1773.48 1323.02,1774.27 Designator1.1@1306.49,1774.27 ; Designator1.1@1323.02,1994.27 Designator1.1@1326.49,1994.27 1332.24,1988.52 1338.77,1988.52 Designator1.13@1470.66,1990.02 1518.77,1990.02 1563.02,2034.27 v2(1563.02,2094.27) 1563.02,2114.27 1529.8,2147.5 Designator1.5@1470.66,2147.5 1346.49,2147.5 Designator1.1@1336.49,2154.27 ; Designator1.1@1339.56,1064.27 1343.02,1067.73 1343.02,1104.27 1413.02,1174.27 v2(1473.02,1174.27) 1473.02,1219.94 Designator1.52@1470.66,1222.3 ; Designator1.P$40@1592.24,2861.75 1592.24,2933.48 1763.02,3104.27 v1(1973.02,3104.27) Designator1.2@1976.49,3054.27 ; Designator1.P$25@1700.5,2596 1728.46,2596 1748.14,2615.69 ; Designator1.P$26@1700.5,2615.69 1748.14,2615.69 ; v2(1723.02,2184.27) 1723.02,2194.27 1748.22,2239.46 Designator1.199@1748.22,2326.63 1748.22,2426 Designator1.1@1766.49,2434.27 ; Designator1.1@1803.02,987.73 Designator1.1@1807.28,987.73 ; Designator1.65@1807.28,1121.91 Designator1.1@1807.28,987.73 ; v2(1813.02,344.27) Designator1.1@1869.56,344.27 ; v2(1863.02,984.27) 1859.56,987.73 Designator1.1@1807.28,987.73 ; v1(2023.02,2534.27) Designator1.1@1946.49,2534.27 1939.56,2541.2 Designator1.1@1939.56,2614.27 1748.14,2615.69 ; v1(2183.02,2824.27) 2198.02,2829.27 Designator1.6@2344.13,2829.27 ; v1(2283.02,2464.27) 2343.02,2464.27 ; Designator1.90@2299.4,1121.91 2299.4,1007.89 v2(2303.02,1004.27) Designator1.1@2303.02,957.73 ; Designator1.2@2339.56,2504.27 2343.02,2504.27 2343.02,2464.27 ; v2(2563.02,1394.27) 2568.22,1399.46 Designator1.114@2675.39,1399.46 2861.29,1399.46 Designator1.1@2883.02,1377.73 ; Designator1.157@2574.99,2326.63 2574.99,2372.3 2563.02,2384.27 2533.02,2384.27 2515.94,2367.18 Designator1.160@2515.94,2326.63 2515.94,2267.18 2493.02,2244.27 2363.02,2244.27 2338.77,2268.52 Designator1.169@2338.77,2326.63 2338.77,2423.48 Designator1.1@2339.56,2424.27 2343.02,2427.73 2343.02,2464.27 ; v2(2583.02,1754.27) 2583.5,1753.8 Designator1.132@2675.39,1753.8 2759.56,1753.8 Designator1.1@2759.56,1744.27 ; Designator1.1@2643.02,637.73 2643.02,664.27 2663.02,684.27 ; Designator1.2@2663.02,710.8 2663.02,684.27 ; Designator1.2@2663.02,830.8 2663.97,841.75 Designator1.9@2749.4,841.75 2800.5,841.75 v2(2823.02,864.27) ; Designator1.2@2683.02,1080.8 2683.02,1064.27 2663.02,1044.27 Designator1.2@2663.02,1017.73 2666.02,1030.72 Designator1.3@2749.4,1030.72 ; Designator1.2@2683.02,1084.27 2683.02,1093.72 Designator1.1@2749.4,1093.72 2743.02,1100.09 v2(2743.02,1144.27) ; v2(2693.02,214.27) 2686.49,220.8 Designator1.2@2686.49,264.27 2697.04,274.82 Designator1.27@2749.4,274.82 ; Designator1.4@2771.02,2664.27 2771.02,2486.27 v1(2803.02,2454.27) 2886.49,2454.27 Designator1.2@2893.02,2460.8 Designator1.1@3063.02,2460.8 ; v2(2813.02,654.27) 2783.02,684.27 Designator1.14@2749.4,684.27 2663.02,684.27 ; v2(3133.02,744.27) 3136.02,747.26 Designator1.43@3196.65,747.26 3266.57,747.26 Designator1.2@3273.02,750.8 ; v2(3143.02,934.27) 3144.99,936.24 Designator1.49@3196.65,936.24 Designator1.2@3269.56,936.24 ; Designator1.2@3273.02,932.77 Designator1.2@3269.56,936.24 ; Designator1.2@3273.02,950.8 Designator1.2@3269.56,936.24
  Top Layer w12: Designator1.187@1984.44,2326.63 1984.44,2365.69 2013.02,2394.27 2013.02,2420.8 Designator1.1@2016.49,2424.27 2023.02,2424.27 v1(2023.02,2534.27) ; Designator1.1@3383.02,1157.73 3383.02,1224.27 v2(3393.02,1234.27) ; Designator1.1@3433.02,750.8 3486.49,750.8 3493.02,744.27
  Top Layer w16: Designator1.2@2683.02,1080.8 Designator1.2@2683.02,1084.27 ; Designator1.3@3598.57,681.47 3535.82,681.47 3493.02,724.27 3493.02,744.27 3493.02,884.27 3613.02,1004.27 3613.02,1065.21 Designator1.+@3622.08,1074.27
  Top Layer w40: v2(3293.02,1234.27) v2(3393.02,1234.27) 3573.02,1234.27 3623.02,1184.27 3623.02,1075.21 Designator1.+@3622.08,1074.27 Designator1.+@3761.84,1074.27 3761.84,1163.09 3863.02,1264.27 3863.02,1411.35 Designator1.2@3845.94,1414.27 3750.02,1530.18 Designator1.4@3750.02,1876.27
  other v2: 3343.02,1234.27
5V: Designator1.2@483.02,470.8 Designator1.2@547.04,204.27 Designator1.2@649.56,624.27 | length 698.2
  Top Layer w24: Designator1.2@547.04,204.27 423.02,204.27 383.02,244.27 383.02,354.27 483.02,454.27 Designator1.2@483.02,470.8 529.56,470.8 649.56,590.8 Designator1.2@649.56,624.27
CCT: Designator1.1@993.02,2410.8 Designator1.2@813.02,2410.8 Designator1.2@903.02,2410.8 Designator1.2@1083.02,2409.23 Designator1.4@428.02,2534.27 Designator1.5@378.02,2634.27 | length 845.2
  Top Layer w10: Designator1.5@378.02,2634.27 Designator1.4@428.02,2534.27 521.49,2410.8 Designator1.2@813.02,2410.8 Designator1.2@903.02,2410.8 Designator1.1@993.02,2410.8 1091.45,2410.8 Designator1.2@1083.02,2409.23
D0: Designator1.2@2749.4,1062.22 Designator1.106 | length 268.4
  Top Layer w10: Designator1.106@2675.39,1241.98 2705.31,1241.98 2783.02,1164.27 2783.02,1074.27 2770.98,1062.22 Designator1.2@2749.4,1062.22
D1: Designator1.4@2749.4,999.23 Designator1.107 | length 377.8
  Top Layer w10: Designator1.107@2675.39,1261.67 2715.62,1261.67 2803.02,1174.27 2803.02,1024.27 2777.98,999.23 Designator1.4@2749.4,999.23
D2: Designator1.5@2749.4,967.73 Designator1.108 | length 456.6
  Top Layer w10: Designator1.108@2675.39,1281.35 2725.94,1281.35 2823.02,1184.27 2823.02,1004.27 2786.49,967.73 Designator1.5@2749.4,967.73
D3: Designator1.7@2749.4,904.74 Designator1.109 | length 554.3
  Top Layer w10: Designator1.109@2675.39,1301.04 2736.25,1301.04 2843.02,1194.27 2843.02,974.27 2773.5,904.74 Designator1.7@2749.4,904.74
D4: Designator1.8@2749.4,873.24 Designator1.110 | length 627.2
  Top Layer w10: Designator1.110@2675.39,1320.72 2746.57,1320.72 2863.02,1204.27 2863.02,964.27 2772,873.24 Designator1.8@2749.4,873.24
D5: Designator1.10@2749.4,810.25 Designator1.111 | length 777.6
  Top Layer w10: Designator1.111@2675.39,1340.41 2756.88,1340.41 2883.02,1214.27 2883.02,844.27 2849.01,810.25 Designator1.10@2749.4,810.25
D6: Designator1.11@2749.4,778.76 Designator1.112 | length 850.5
  Top Layer w10: Designator1.112@2675.39,1360.09 2767.2,1360.09 2903.02,1224.27 2903.02,834.27 2847.51,778.76 Designator1.11@2749.4,778.76
D7: Designator1.13@2749.4,715.76 Designator1.118 | length 1389.5
  Top Layer w10: Designator1.118@2675.39,1478.2 2939.09,1478.2 2993.02,1424.27 2993.02,754.27 3023.02,724.27 v1(3053.02,724.27) ; Designator1.13@2749.4,715.76 2854.52,715.76 v1(2863.02,724.27)
  Bottom Layer w10: v1(2863.02,724.27) v1(3053.02,724.27)
D8: Designator1.42@3196.65,715.76 Designator1.119 | length 1208.4
  Top Layer w10: Designator1.119@2675.39,1497.89 2949.4,1497.89 3013.02,1434.27 3013.02,814.27 3111.53,715.76 Designator1.42@3196.65,715.76
D9: Designator1.44@3196.65,778.76 Designator1.120 | length 1190.5
  Top Layer w10: Designator1.120@2675.39,1517.57 2959.72,1517.57 3033.02,1444.27 3033.02,824.27 3078.54,778.76 Designator1.44@3196.65,778.76
D10: Designator1.45@3196.65,810.25 Designator1.121 | length 1185.6
  Top Layer w10: Designator1.121@2675.39,1537.26 2970.03,1537.26 3053.02,1454.27 3053.02,834.27 3077.04,810.25 Designator1.45@3196.65,810.25
D11: Designator1.47@3196.65,873.24 Designator1.122 | length 1120.8
  Top Layer w10: Designator1.122@2675.39,1556.94 2980.35,1556.94 3073.02,1464.27 3073.02,924.27 3124.05,873.24 Designator1.47@3196.65,873.24
D12: Designator1.48@3196.65,904.74 Designator1.123 | length 1110
  Top Layer w10: Designator1.123@2675.39,1576.63 2990.66,1576.63 3093.02,1474.27 3093.02,944.27 3132.55,904.74 Designator1.48@3196.65,904.74
D13: Designator1.50@3196.65,967.73 Designator1.124 | length 1068.7
  Top Layer w10: Designator1.124@2675.39,1596.31 3000.98,1596.31 3113.02,1484.27 3113.02,994.27 3139.56,967.73 Designator1.50@3196.65,967.73
D14: Designator1.51@3196.65,999.23 Designator1.125 | length 1052.1
  Top Layer w10: Designator1.125@2675.39,1616 3011.29,1616 3133.02,1494.27 3133.02,1024.27 3158.06,999.23 Designator1.51@3196.65,999.23
D15: Designator1.53@3196.65,1062.22 Designator1.126 | length 1010.7
  Top Layer w10: Designator1.126@2675.39,1635.69 3021.61,1635.69 3153.02,1504.27 3153.02,1074.27 3165.07,1062.22 Designator1.53@3196.65,1062.22
GND: Designator1.1@483.02,537.73 Designator1.1@547.04,113.72 Designator1.1@773.02,757.73 Designator1.1@929.56,1364.27 Designator1.1@986.49,624.27 Designator1.1@989.56,1124.27 Designator1.1@1083.02,2807.73 Designator1.1@1163.02,2807.73 Designator1.1@1189.56,1394.27 Designator1.1@1209.56,2364.27 Designator1.1@1309.56,484.27 Designator1.1@1406.49,904.27 Designator1.1@1473.02,697.73 Designator1.1@1613.02,697.73 Designator1.1@1819.56,2684.27 Designator1.1@1846.49,2794.27 Designator1.1@2303.02,109.27 Designator1.1@2406.49,2504.27 Designator1.1@2619.56,264.27 Designator1.1@2663.02,777.73 Designator1.1@2663.02,897.73 Designator1.1@2663.02,950.8 Designator1.1@2683.02,1147.73 Designator1.1@2823.02,1980.8 Designator1.1@2946.49,2344.27 Designator1.1@2953.02,2267.73 Designator1.1@3136.49,2174.27 Designator1.1@3273.02,817.73 Designator1.1@3273.02,1017.73 Designator1.1@3583.02,257.73 Designator1.1@3823.02,907.73 Designator1.2@489.56,614.27 Designator1.2@799.56,624.27 Designator1.2@823.02,2947.73 Designator1.2@993.02,2477.73 Designator1.2@1013.02,757.73 Designator1.2@1165.62,907.58 Designator1.2@1209.56,1594.27 Designator1.2@1209.56,2474.27 Designator1.2@1239.56,1774.27 Designator1.2@1239.56,2754.27 Designator1.2@1239.56,2834.27 Designator1.2@1249.56,1494.27 Designator1.2@1259.56,1994.27 Designator1.2@1269.56,2154.27 Designator1.2@1369.56,2364.27 Designator1.2@1376.49,664.27 Designator1.2@1406.49,1064.27 Designator1.2@1493.02,3087.73 Designator1.2@1593.02,3087.73 Designator1.2@1699.56,2434.27 Designator1.2@1803.02,920.8 Designator1.2@1869.56,444.27 Designator1.2@1879.56,2534.27 Designator1.2@1949.56,2424.27 Designator1.2@2006.49,2614.27 Designator1.2@2043.02,920.8 Designator1.2@2103.02,109.27 Designator1.2@2195.31,2664.27 Designator1.2@2203.02,2487.73 Designator1.2@2303.02,890.8 Designator1.2@2406.49,2424.27 Designator1.2@2673.02,2387.73 Designator1.2@2743.02,2387.73 Designator1.2@2826.49,1744.27 Designator1.2@2883.02,1310.8 Designator1.2@3063.02,2527.73 Designator1.2@3146.49,1694.27 Designator1.2@3146.49,1774.27 Designator1.2@3146.49,1854.27 Designator1.2@3383.02,1090.8 Designator1.2@3433.02,817.73 Designator1.2@3463.02,305.45 Designator1.2@3673.02,257.73 Designator1.3@1803.02,109.27 Designator1.3@3683.02,1876.27 Designator1.4@553.02,814.27 Designator1.4@2003.02,109.27 Designator1.4@3598.57,655.88 Designator1.6@553.02,914.27 Designator1.6@1470.66,2127.81 Designator1.6@2749.4,936.24 Designator1.6@2857.02,2664.27 Designator1.6@3683.02,2204.27 Designator1.7@303.02,894.27 Designator1.7@2344.13,2879.27 Designator1.8@203.02,894.27 Designator1.8@553.02,1014.27 Designator1.10@553.02,1114.27 Designator1.12@553.02,1214.27 Designator1.12@2749.4,747.26 Designator1.13@718.02,2759.27 Designator1.14@88.02,2759.27 Designator1.14@553.02,1314.27 Designator1.14@1470.66,1970.33 Designator1.25@1470.66,1753.8 Designator1.28@3196.65,274.82 Designator1.33@1470.66,1596.31 Designator1.39@1470.66,1478.2 Designator1.41@3196.65,684.27 Designator1.44@1470.66,1379.78 Designator1.46@3196.65,841.75 Designator1.52@3196.65,1030.72 Designator1.53@1571.06,1121.91 Designator1.54@3196.65,1093.72 Designator1.66 Designator1.78 Designator1.91 Designator1.113 Designator1.133 Designator1.146 Designator1.153 Designator1.156 Designator1.170 Designator1.173 Designator1.188 Designator1.200 Designator1.204 Designator1.- Designator1.A@3323.02,1800.88 Designator1.GND@1030.52,531.27 Designator1.GND@1556.02,352.69 Designator1.P$1@1385.54,2812.54 Designator1.P$2@1385.54,2792.85 Designator1.P$3@1385.54,2773.17 Designator1.P$4@3278.61,2814.11 Designator1.P$13 Designator1.P$17 Designator1.P$24 Designator1.P$30 Designator1.P$37 Designator1.P$41 Designator1.V- | length 801.1
  Top Layer w10: Designator1.1@2683.02,1144.27 Designator1.1@2683.02,1147.73 ; 2703.02,764.27 2720.03,747.26 Designator1.12@2749.4,747.26
  Bottom Layer w10: v4(533.02,1984.27) v4(763.02,1984.27) ; v4(813.02,1584.27) v4(963.02,1734.27) ; v2(2543.02,1244.27) v2(2643.02,1144.27)
  Bottom Layer w16: v2(3593.02,784.27) 3543.02,734.27 Designator1.V-@3633.02,734.27
  other v2: 2873.02,1934.27 3243.02,1944.27 2793.02,2164.27 3193.02,2334.27
LED_A: Designator1.1@1073.02,2880.8 Designator1.1@1153.02,2880.8 Designator1.P$43 | length 613.7
  Top Layer w10: Designator1.1@1073.02,2880.8 Designator1.1@1153.02,2880.8 1189.56,2880.8 1193.02,2884.27 1193.02,2964.27 1213.02,2984.27 1433.02,2984.27 1533.18,2884.11 Designator1.P$43@1533.18,2861.75
LED_B: Designator1.1@913.02,2880.8 Designator1.1@993.02,2880.8 Designator1.P$42 | length 909.2
  Top Layer w10: Designator1.1@913.02,2880.8 Designator1.1@993.02,2880.8 996.49,2884.27 1023.02,2884.27 1033.02,2894.27 1033.02,3034.27 1073.02,3074.27 1373.02,3074.27 1552.87,2894.43 Designator1.P$42@1552.87,2861.75
LED_SPEED: Designator1.2@913.02,2947.73 Designator1.10@563.02,3077.27 | length 426.8
  Top Layer w10: Designator1.10@563.02,3077.27 563.02,3074.27 643.02,2994.27 903.02,2994.27 913.02,2984.27 Designator1.2@913.02,2947.73
N$1: Designator1.3@653.02,814.27 Designator1.4@854.01,1375.88 Designator1.35@1470.66,1556.94 | length 1416
  Top Layer w10: Designator1.3@653.02,814.27 854.01,1015.25 v3(854.01,1284.27) Designator1.4@854.01,1375.88 ; v3(1413.02,1554.27) 1415.7,1556.94 Designator1.35@1470.66,1556.94
  Bottom Layer w10: v3(854.01,1284.27) 854.01,1355.25 1053.02,1554.27 v3(1413.02,1554.27)
N$2: Designator1.2@996.49,1364.27 Designator1.2@1233.02,1294.27 Designator1.45@1470.66,1360.09 | length 537.5
  Top Layer w10: Designator1.2@996.49,1364.27 1046.49,1294.27 Designator1.2@1233.02,1294.27 1343.02,1294.27 1408.85,1360.09 Designator1.45@1470.66,1360.09
N$3: Designator1.1@1233.02,1194.27 Designator1.2@1056.49,1124.27 Designator1.46@1470.66,1340.41 | length 503.7
  Top Layer w10: Designator1.2@1056.49,1124.27 1126.49,1194.27 Designator1.1@1233.02,1194.27 1273.02,1194.27 1419.17,1340.41 Designator1.46@1470.66,1340.41
N$4: Designator1.1@2948.02,2034.27 Designator1.2@2823.02,2047.73 Designator1.149 | length 310.6
  Top Layer w10: Designator1.149@2675.39,2088.44 2808.85,2088.44 2823.02,2074.27 Designator1.2@2823.02,2047.73 2934.56,2047.73 Designator1.1@2948.02,2034.27
N$5: Designator1.2@3069.56,2174.27 Designator1.2@3218.02,2034.27 Designator1.150 | length 640.8
  Top Layer w10: Designator1.150@2675.39,2108.13 3073.02,2108.13 ; Designator1.2@3069.56,2174.27 3069.56,2111.59 3073.02,2108.13 ; Designator1.2@3218.02,2034.27 3144.17,2108.13 3073.02,2108.13
N$6: Designator1.2@3023.02,2230.8 Designator1.151 | length 435.1
  Top Layer w10: Designator1.151@2675.39,2127.81 2996.57,2127.81 3023.02,2154.27 Designator1.2@3023.02,2230.8
N$7: Designator1.18@2749.4,558.28 Designator1.105 | length 821.8
  Top Layer w10: Designator1.105@2675.39,1222.3 2651.06,1222.3 2603.02,1174.27 2603.02,614.27 2613.02,604.27 2673.02,604.27 2719.01,558.28 Designator1.18@2749.4,558.28
N$8: Designator1.17@2749.4,589.78 Designator1.104 | length 845.2
  Top Layer w10: Designator1.104@2574.99,1121.91 2574.99,1052.3 2583.02,1044.27 2583.02,584.27 v1(2593.02,574.27) ; Designator1.17@2749.4,589.78 2797.51,589.78 v1(2813.02,574.27)
  Bottom Layer w10: v1(2593.02,574.27) v1(2813.02,574.27)
N$9: Designator1.16@2749.4,621.28 Designator1.116 | length 1270.9
  Top Layer w10: Designator1.116@2675.39,1438.83 2918.46,1438.83 2953.02,1404.27 2953.02,634.27 2940.03,621.28 Designator1.16@2749.4,621.28
N$10: Designator1.15@2749.4,652.77 Designator1.99 | length 784.4
  Top Layer w10: Designator1.99@2476.57,1121.91 2476.57,1080.72 2483.02,1074.27 2483.02,634.27 v1(2493.02,624.27) ; v1(2703.02,624.27) 2703.02,644.27 2711.53,652.77 Designator1.15@2749.4,652.77
  Bottom Layer w10: v1(2493.02,624.27) v1(2703.02,624.27)
N$11: Designator1.23@2749.4,400.8 Designator1.98 | length 931.8
  Top Layer w10: Designator1.98@2456.88,1121.91 2456.88,1070.41 2463.02,1064.27 2463.02,534.27 2596.49,400.8 Designator1.23@2749.4,400.8
N$12: Designator1.24@2749.4,369.31 Designator1.97 | length 970.6
  Top Layer w10: Designator1.97@2437.2,1121.91 2437.2,1060.09 2443.02,1054.27 2443.02,524.27 2597.98,369.31 Designator1.24@2749.4,369.31
N$29: Designator1.20@2749.4,495.29 Designator1.81 | length 1290.9
  Top Layer w10: Designator1.81@2122.24,1121.91 2122.24,715.05 2133.02,704.27 v1(2133.02,604.27) ; Designator1.20@2749.4,495.29 2794.05,495.29 v1(2803.02,504.27)
  Bottom Layer w10: v1(2133.02,604.27) 2213.02,524.27 2663.02,524.27 2683.02,504.27 v1(2803.02,504.27)
N$30: Designator1.21@2749.4,463.8 Designator1.80 | length 1175.5
  Top Layer w10: Designator1.80@2102.55,1121.91 2102.55,684.74 v1(2103.02,684.27) ; v1(2493.02,554.27) 2543.02,504.27 2593.02,504.27 2633.5,463.8 Designator1.21@2749.4,463.8
  Bottom Layer w10: v1(2103.02,684.27) 2233.02,554.27 v1(2493.02,554.27)
N$31: Designator1.38@3196.65,589.78 Designator1.115 | length 1329.8
  Top Layer w10: Designator1.115@2675.39,1419.15 2908.14,1419.15 2933.02,1394.27 2933.02,674.27 v1(2913.02,654.27) ; v1(3153.02,594.27) 3157.51,589.78 Designator1.38@3196.65,589.78
  Bottom Layer w10: v1(2913.02,654.27) 2963.02,594.27 v1(3153.02,594.27)
N$32: Designator1.25@2749.4,337.81 Designator1.96 | length 1009.4
  Top Layer w10: Designator1.96@2417.51,1121.91 2417.51,1049.78 2423.02,1044.27 2423.02,514.27 2599.48,337.81 Designator1.25@2749.4,337.81
N$33: Designator1.26@2749.4,306.31 Designator1.95 | length 1048.2
  Top Layer w10: Designator1.95@2397.83,1121.91 2397.83,1039.46 2403.02,1034.27 2403.02,504.27 2600.98,306.31 Designator1.26@2749.4,306.31
N$34: Designator1.1@2642.02,2664.27 Designator1.191 | length 1282.9
  Top Layer w10: Designator1.191@1905.7,2326.63 1905.7,2231.59 2013.02,2124.27 v1(2033.02,2124.27) ; Designator1.1@2642.02,2664.27 2642.02,2525.27 v1(2693.02,2474.27)
  Bottom Layer w10: v1(2033.02,2124.27) 2193.02,2124.27 2543.02,2474.27 v1(2693.02,2474.27)
N$35: Designator1.1@933.02,690.8 Designator1.1@1013.02,690.8 Designator1.2@919.56,624.27 Designator1.D+@932.52,531.27 | length 254
  Top Layer w10: Designator1.D+@932.52,531.27 932.52,611.3 Designator1.2@919.56,624.27 933.02,637.73 Designator1.1@933.02,690.8 933.02,694.27 Designator1.1@1013.02,690.8
N$36: Designator1.2@933.02,757.73 Designator1.51@1470.66,1241.98 | length 808.5
  Top Layer w10: Designator1.2@933.02,757.73 933.02,804.27 1103.02,974.27 1243.02,974.27 1283.02,1014.27 1283.02,1087.73 1437.28,1241.98 Designator1.51@1470.66,1241.98
N$37: Designator1.2@1093.02,1356.55 Designator1.43@1470.66,1399.46 | length 395.4
  Top Layer w10: Designator1.2@1093.02,1356.55 1345.31,1356.55 1388.22,1399.46 Designator1.43@1470.66,1399.46
N$38: Designator1.2@853.02,757.73 Designator1.50@1470.66,1261.67 | length 867.4
  Top Layer w10: Designator1.2@853.02,757.73 1089.56,994.27 1233.02,994.27 1263.02,1024.27 1263.02,1094.27 1430.43,1261.67 Designator1.50@1470.66,1261.67
N$39: Designator1.2@1981.92,2879.27 Designator1.181 | length 665
  Top Layer w10: Designator1.2@1981.92,2879.27 2088.02,2879.27 2103.02,2864.27 2102.55,2843.8 Designator1.181@2102.55,2326.63
N$40: Designator1.1@3743.02,547.73 Designator1.3@1203.02,820.96 Designator1.5@3817.02,1876.27 Designator1.7@3767.47,707.06 | length 4569.3
  Top Layer w10: Designator1.3@1203.02,820.96 1209.72,814.27 v2(1313.02,814.27) ; v2(3353.02,254.27) 3383.02,284.27 3383.02,364.27 3453.02,434.27 3653.02,434.27 3703.02,484.27 3703.02,534.27 3713.02,544.27 3739.56,544.27 Designator1.1@3743.02,547.73 3743.02,594.27 3723.02,614.27 3723.02,694.27 3735.82,707.06 Designator1.7@3767.47,707.06 3835.82,707.06 v2(3853.02,724.27)
  Top Layer w16: Designator1.5@3817.02,1876.27 3817.02,1790.27 v2(3833.02,1774.27)
  Bottom Layer w10: v2(1313.02,814.27) 1273.02,774.27 1273.02,684.27 1703.02,254.27 v2(3353.02,254.27) ; v2(3833.02,1774.27) 3833.02,744.27 v2(3853.02,724.27)
N$41: Designator1.1@1981.92,2929.27 Designator1.180 | length 729.4
  Top Layer w10: Designator1.1@1981.92,2929.27 2098.02,2929.27 2123.02,2904.27 2123.02,2327.42 Designator1.180@2122.24,2326.63